# Altium PCB PCB.PcbDoc
Units mm, origin at the board's own origin, x right, y up, seen from the top; angles counter-clockwise.
Board outline 138.3 x 81.41 mm, 2 copper layers (Top Layer, Bottom Layer); 60 components, 9 nets, 156 pads, 0 vias.
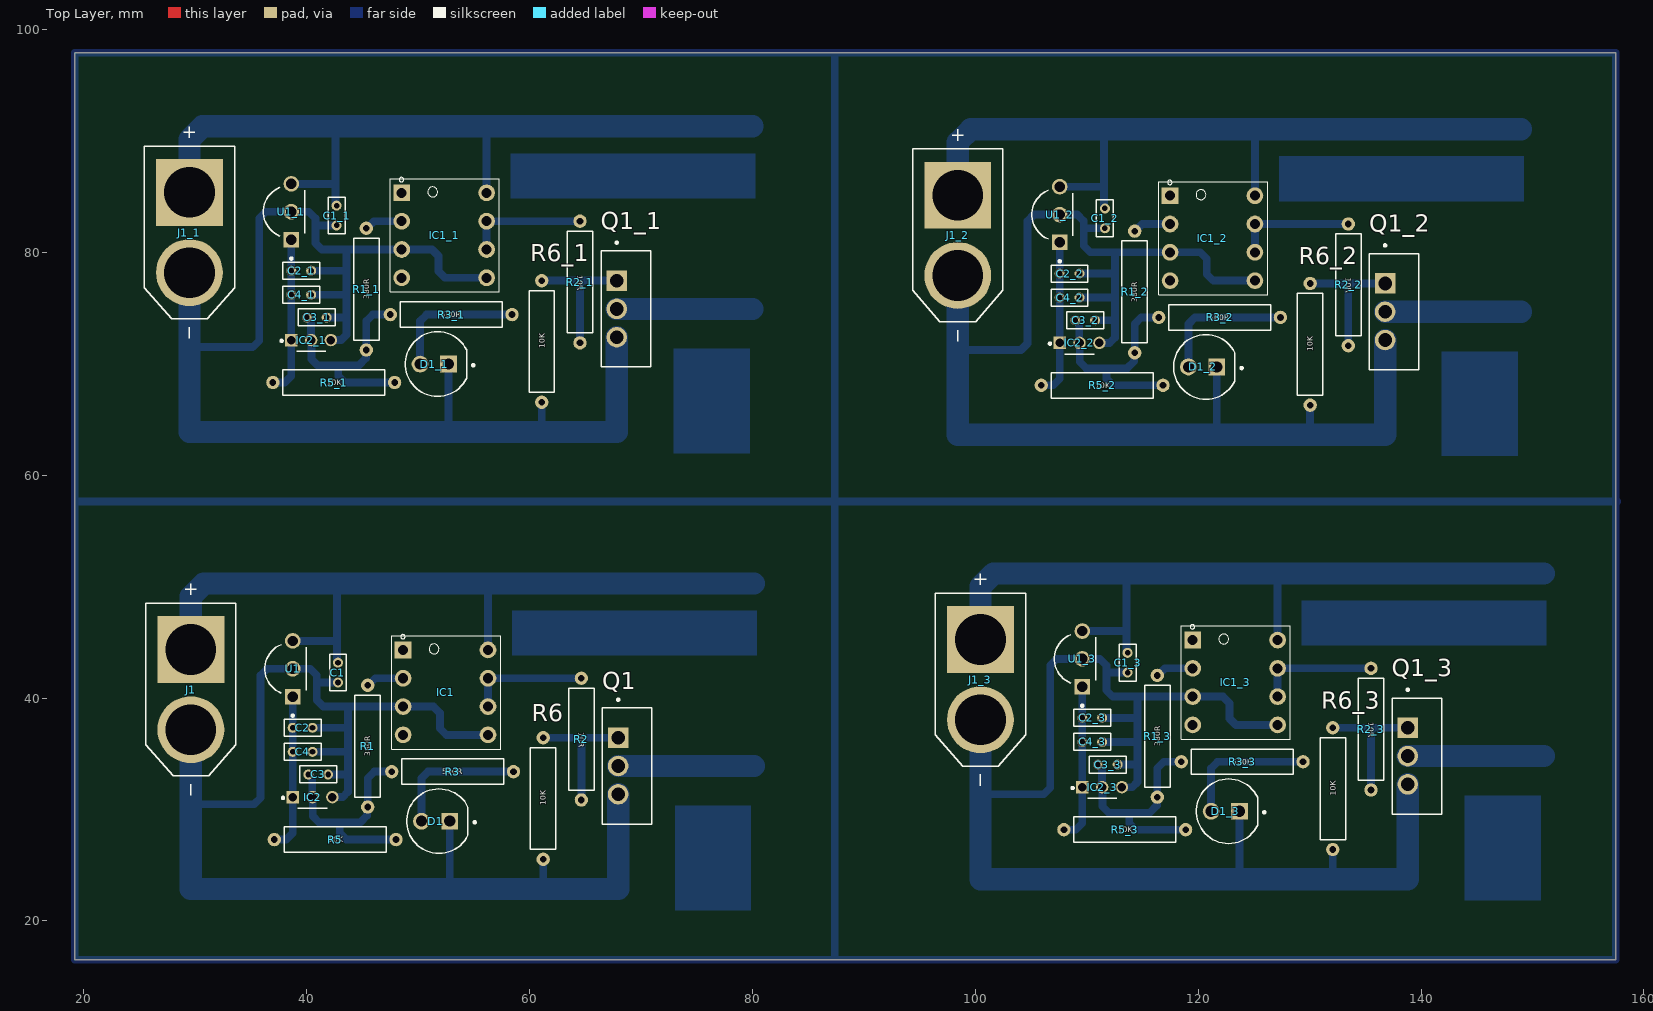
[diagram p0: Top Layer view]
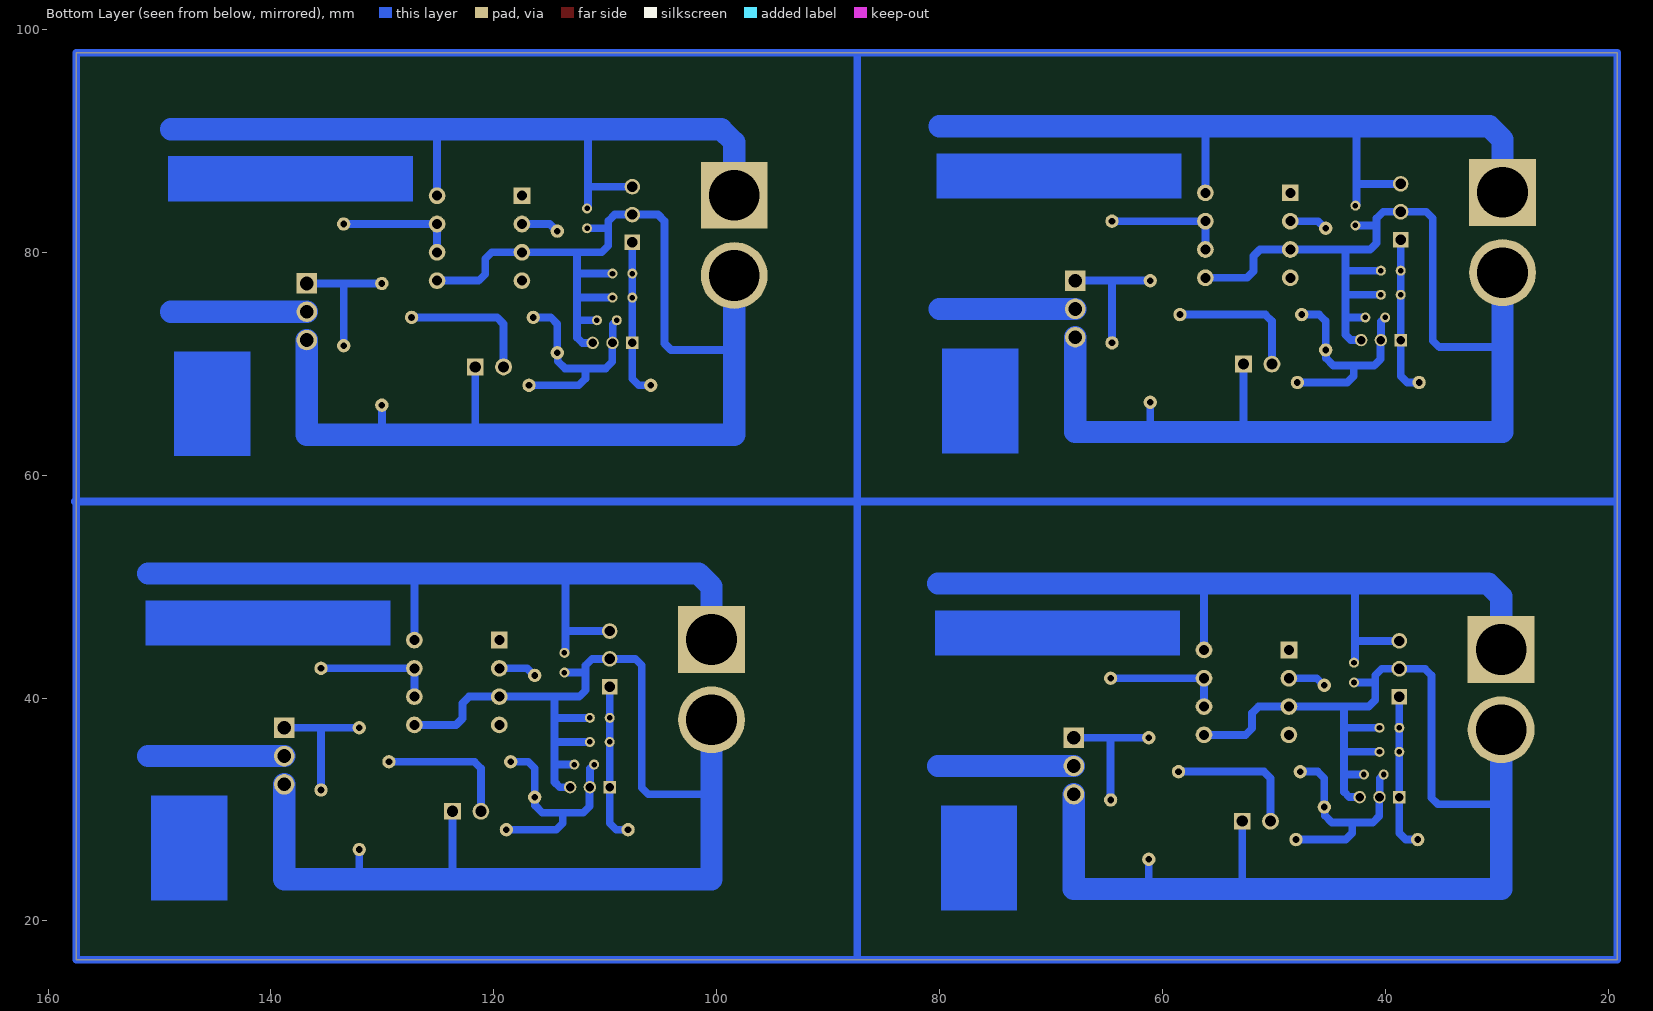
[diagram p1: Bottom Layer view, seen from below]
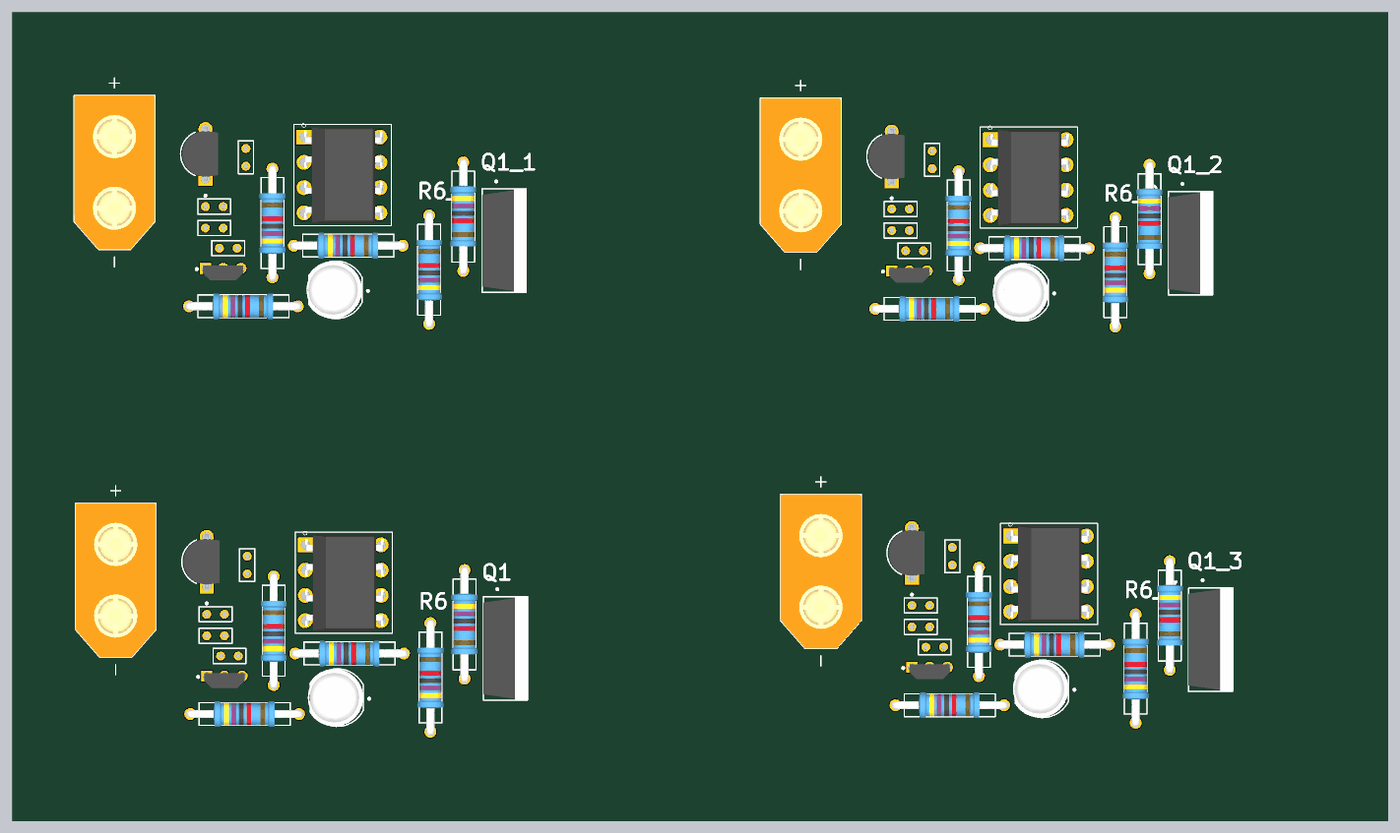
[diagram p2: 3D render of the assembled board from above, using the file's embedded part models]

## Layer stack, top to bottom
Top Solder: solder mask 0.0102, Solder Resist, Dk 3.5
Top Layer: signal copper 0.0356
Dielectric 1: dielectric 0.32, FR-4, Dk 4.8
Bottom Layer: signal copper 0.0356
Bottom Solder: solder mask 0.0102, Solder Resist, Dk 3.5

## Board outline
19.177,16.51 19.177,97.917 157.48,97.917 157.48,16.51

## Design rules (kind name [scope] priority, off if disabled: settings)
Clearance [All] p1: gap=0.254 ignorepadtopadclearanceinfootprint=FALSE
PolygonConnect [All] p1: connectstyle=Relief reliefconductorwidth=0.254 reliefentries=4 polygonreliefangle="90 Angle" airgapwidth=0.254
RoutingVias [All] p1: holewidth=0.711 width=1.27 viastyle="Through Hole" minholewidth=0.711 minwidth=1.27 maxholewidth=0.711 maxwidth=1.27
SolderMaskExpansion [All] p1: expansion=0.102 istentingtop=FALSE
SupplyNets "Schematic Supply Nets" [InNet('GND')] p1: voltage=0.000
Width [All] p1: maxlimit=5 minlimit=0.254 preferedwidth=1 minimp=50.000000 maximp=50.000000 favimp=50.000000
30 further rules are at their usual default settings.

## Classes and differential pairs
component class Sch: C1 C2 C3 C4 D1 IC1 IC2 J1 Q1 R1 R2 R3 R5 R6 U1

## Components (designator, comment, footprint, x,y, rotation, side; value= is the part's Value field where it differs from the comment)
C1 "0.33uF" CER-DIP-CAP 42.799,42.291 r90 top
C1_1 "0.33uF" CER-DIP-CAP 42.672,83.312 r90 top (schematic designator C1)
C1_2 "0.33uF" CER-DIP-CAP 111.633,83.058 r90 top (schematic designator C1)
C1_3 "0.33uF" CER-DIP-CAP 113.665,43.18 r90 top (schematic designator C1)
C2 "0.01uF" CER-DIP-CAP 39.624,37.338 r180 top
C2_1 "0.01uF" CER-DIP-CAP 39.497,78.359 r180 top (schematic designator C2)
C2_2 "0.01uF" CER-DIP-CAP 108.458,78.105 r180 top (schematic designator C2)
C2_3 "0.01uF" CER-DIP-CAP 110.49,38.227 r180 top (schematic designator C2)
C3 "4.7nF" CER-DIP-CAP 41.021,33.147 r180 top
C3_1 "4.7nF" CER-DIP-CAP 40.894,74.168 r180 top (schematic designator C3)
C3_2 "4.7nF" CER-DIP-CAP 109.855,73.914 r180 top (schematic designator C3)
C3_3 "4.7nF" CER-DIP-CAP 111.887,34.036 r180 top (schematic designator C3)
C4 "100nF" CER-DIP-CAP 39.624,35.179 r180 top
C4_1 "100nF" CER-DIP-CAP 39.497,76.2 r180 top (schematic designator C4)
C4_2 "100nF" CER-DIP-CAP 108.458,75.946 r180 top (schematic designator C4)
C4_3 "100nF" CER-DIP-CAP 110.49,36.068 r180 top (schematic designator C4)
D1 "LED" "LED DIP" 51.562,28.956 r180 top
D1_1 "LED" "LED DIP" 51.435,69.977 r180 top (schematic designator D1)
D1_2 "LED" "LED DIP" 120.396,69.723 r180 top (schematic designator D1)
D1_3 "LED" "LED DIP" 122.428,29.845 r180 top (schematic designator D1)
IC1 "TLP250" DIP-8 53.086,40.513 r0 top
IC1_1 "TLP250" DIP-8 52.959,81.534 r0 top (schematic designator IC1)
IC1_2 "TLP250" DIP-8 121.92,81.28 r0 top (schematic designator IC1)
IC1_3 "TLP250" DIP-8 123.952,41.402 r0 top (schematic designator IC1)
IC2 "US1881" UA 40.513,30.861 r0 top
IC2_1 "US1881" UA 40.386,71.882 r0 top (schematic designator IC2)
IC2_2 "US1881" UA 109.347,71.628 r0 top (schematic designator IC2)
IC2_3 "US1881" UA 111.379,31.75 r0 top (schematic designator IC2)
J1 "XT60 Male" "XT60 Male Pin" 29.591,40.767 r270 top
J1_1 "XT60 Male" "XT60 Male Pin" 29.464,81.788 r270 top (schematic designator J1)
J1_2 "XT60 Male" "XT60 Male Pin" 98.425,81.534 r270 top (schematic designator J1)
J1_3 "XT60 Male" "XT60 Male Pin" 100.457,41.656 r270 top (schematic designator J1)
Q1 "TO-220 IRF1405" TO-220 68.755,33.909 r270 top
Q1_1 "TO-220 IRF1405" TO-220 68.628,74.93 r270 top (schematic designator Q1)
Q1_2 "TO-220 IRF1405" TO-220 137.589,74.676 r270 top (schematic designator Q1)
Q1_3 "TO-220 IRF1405" TO-220 139.621,34.798 r270 top (schematic designator Q1)
R1 "380R" "RES DIP" 45.466,35.687 r90 top
R1_1 "380R" "RES DIP" 45.339,76.708 r90 top (schematic designator R1)
R1_2 "380R" "RES DIP" 114.3,76.454 r90 top (schematic designator R1)
R1_3 "380R" "RES DIP" 116.332,36.576 r90 top (schematic designator R1)
R2 "10R" "RES DIP" 64.643,36.322 r270 top
R2_1 "10R" "RES DIP" 64.516,77.343 r270 top (schematic designator R2)
R2_2 "10R" "RES DIP" 133.477,77.089 r270 top (schematic designator R2)
R2_3 "10R" "RES DIP" 135.509,37.211 r270 top (schematic designator R2)
R3 "500R" "RES DIP" 53.086,33.401 r0 top
R3_1 "500R" "RES DIP" 52.959,74.422 r0 top (schematic designator R3)
R3_2 "500R" "RES DIP" 121.92,74.168 r0 top (schematic designator R3)
R3_3 "500R" "RES DIP" 123.952,34.29 r0 top (schematic designator R3)
R5 "10K" "RES DIP" 42.545,27.305 r0 top
R5_1 "10K" "RES DIP" 42.418,68.326 r0 top (schematic designator R5)
R5_2 "10K" "RES DIP" 111.379,68.072 r0 top (schematic designator R5)
R5_3 "10K" "RES DIP" 113.411,28.194 r0 top (schematic designator R5)
R6 "10K" "RES DIP" 61.214,30.988 r90 top
R6_1 "10K" "RES DIP" 61.087,72.009 r90 top (schematic designator R6)
R6_2 "10K" "RES DIP" 130.048,71.755 r90 top (schematic designator R6)
R6_3 "10K" "RES DIP" 132.08,31.877 r90 top (schematic designator R6)
U1 "TO-92 LM78L05" "TO-226 TO-92" 38.735,42.632 r90 top
U1_1 "TO-92 LM78L05" "TO-226 TO-92" 38.608,83.653 r90 top (schematic designator U1)
U1_2 "TO-92 LM78L05" "TO-226 TO-92" 107.569,83.399 r90 top (schematic designator U1)
U1_3 "TO-92 LM78L05" "TO-226 TO-92" 109.601,43.521 r90 top (schematic designator U1)

## Footprints (in the part's own frame and the unit in brackets; to place one, negate y for a bottom-side part, rotate by r counter-clockwise, add the part's x,y. Pads: shape width x height; smd on the part's side, far side on the other; paste and mask are expansions set on the pad)
CER-DIP-CAP [mm]
  round 0.9 hole 0.5: 1(-0.889,0) 2(0.889,0)
  silkscreen extent -1.65,-0.76 1.65,0.76, body extent -1.51,-0.58 1.49,0.57, height 4
DIP-8 [mm]
  rect 1.5x1.5 / inner round 1.5 / far side rect 1.5x1.5 hole 0.9: 1(-4.445,3.81)
  round 1.5 hole 0.9: 2(-4.445,1.27) 3(-4.445,-1.27) 4(-4.445,-3.81) 5(3.175,-3.81) 6(3.175,-1.27) 7(3.175,1.27) 8(3.175,3.81)
  silkscreen extent -5.46,-5.08 4.32,5.2, body extent -4.44,-4.83 3.43,4.83, height 4.85
"LED DIP" [mm]
  round 1.508 hole 1: A(1.27,0)
  rect 1.508x1.508 / inner round 1.508 / far side rect 1.508x1.508 hole 1: C(-1.27,0)
  silkscreen extent -3.6,-2.9 2.6,2.9, body extent -2.9,-2.9 2.51,2.9, height 9.6
"RES DIP" [mm]
  round 1.2 hole 0.6: 1(-5.461,0) 2(5.461,0)
  silkscreen extent -4.57,-1.14 4.57,1.14, body extent -5.93,-1.3 5.93,1.3, height 2.8
TO-220 [mm]
  rect 1.845x1.845 / inner round 1.845 / far side rect 1.845x1.845 hole 1.23: 1(-2.54,-0.81)
  round 1.845 hole 1.23: 2(0,-0.81) 3(2.54,-0.81)
  silkscreen extent -6.06,-2.22 5.21,2.22, body extent -5.21,-2.22 5.21,2.22, height 19.3
"TO-226 TO-92" [mm]
  rect 1.4x1.4 / inner round 1.4 / far side rect 1.4x1.4 hole 0.93: 1(-2.5,0)
  round 1.4 hole 0.93: 2(0,0) 3(2.5,0)
  silkscreen extent -4.3,-1.19 2.18,2.5, body extent -2.74,-1.27 2.74,2.33, height 8.09
UA [mm]
  rect 1.12x1.12 / inner round 1.12 / far side rect 1.12x1.12 hole 0.77: 1(-1.778,0.254)
  round 1.12 hole 0.77: 2(0,0.254) 3(1.778,0.254)
  silkscreen extent -2.75,-0.75 1.31,0.28, body extent -2.05,-0.93 2.05,0.57, height 4.95
"XT60 Male Pin" [mm]
  round 6 hole 4.55: N(3.6,0)
  rect 6x6 / inner round 6 / far side rect 6x6 hole 4.55: P(-3.6,0)
  silkscreen extent -9.5,-4.05 9.5,4.05, body extent -7.75,-4.05 7.75,4.05, height 16.5

## Part data
C1 C1_1 C1_2 C1_3 C2 C2_1 C2_2 C2_3 C3 C3_1 C3_2 C3_3 C4 C4_1 C4_2 C4_3: library part "CAP DIP"
D1 D1_1 D1_2 D1_3: library part "LED DIP"
IC1 IC1_1 IC1_2 IC1_3: library part TLP250-DIP
J1 J1_1 J1_2 J1_3: library part "XT60 Male Pin"
Q1 Q1_1 Q1_2 Q1_3: library part "TO-220 MOSFET"
R1 R1_1 R1_2 R1_3 R2 R2_1 R2_2 R2_3 R3 R3_1 R3_2 R3_3 R5 R5_1 R5_2 R5_3 R6 R6_1 R6_2 R6_3: library part "RES DIP"
U1 U1_1 U1_2 U1_3: library part TO-92

## Nets (pads, with @x,y where several pads share a name; then routed paths per layer and width w, separated by ;. In a path a pad name is that pad's centre, name@x,y a point inside that pad or via, vN(x,y) a via of type N, cw(c..) or ccw(c..) an arc to the next point about the centre after c; other vN are vias at no path point)
3S-6S: C1.2 IC1.8 J1.P U1.3 | length 76.3
  Bottom Layer w0.7: U1.3 42.656,45.132 42.703,45.085 ; 42.703,49.942 42.703,45.085 ; C1.2 42.703,43.276 42.703,45.085 ; IC1.8 56.261,50.292
  Bottom Layer w0.8: 42.703,49.942 42.703,50.292 ; 56.261,50.292 56.261,50.546
  Bottom Layer w1: 42.577,49.816 42.703,49.942 43.053,50.292
  Bottom Layer w2: J1.P@31.379,46.155 J1.P 29.591,49.12 30.763,50.292 42.703,50.292 43.053,50.292 56.261,50.292 80.137,50.292
5V: C2.2 C4.2 IC2.1 R5.1 U1.1 | length 14.1
  Bottom Layer w0.7: R5.1 38.149,27.305 38.735,27.891 IC2.1 C4.2 C2.2 U1.1
GND: C1.1 C2.1 C3.1 C4.1 D1.C IC1.3 IC1.5 IC2.3 J1.N Q1.3 R6.1 U1.2 | length 131.7
  Bottom Layer w0.7: 29.591,30.48 35.266,30.48 35.852,31.066 35.852,42.046 36.438,42.632 U1.2 40.308,42.632 40.894,42.046 40.894,41.402 ; C4.1 43.688,35.179 ; C2.1 43.688,37.338 ; C3.1 43.688,33.147 ; IC2.3@42.268,31.138 IC2.3 43.219,31.115 43.688,31.584 43.688,33.147 ; C1.1 40.894,41.402 ; 52.832,22.987 D1.C ; IC1.5 52.529,36.703 51.943,37.289 51.943,38.657 51.357,39.243 IC1.3 43.561,39.243 ; 61.214,22.987 R6.1 ; 40.894,41.402 40.894,39.829 41.48,39.243 43.561,39.243 ; 43.561,39.243 43.688,39.116 43.688,37.338 ; 43.688,33.147 43.688,35.179 ; 43.688,35.179 43.688,37.338
  Bottom Layer w1: 61.087,22.86 61.214,22.987
  Bottom Layer w2: J1.N 29.591,30.48 29.591,22.86 61.087,22.86 67.945,22.86 ; 67.945,23.114 Q1.3
HallOut: C3.2 IC2.2 R1.1 R3.1 R5.2 | length 21.2
  Bottom Layer w0.7: C3.2 40.49,32.789 40.49,31.138 IC2.2 40.536,31.092 40.536,29.415 41.122,28.829 42.951,28.829 ; R1.1@45.428,30.134 45.428,29.477 44.78,28.829 42.951,28.829 ; R1.1 45.466,32.815 46.052,33.401 R3.1 ; R5.2 43.537,27.305 42.951,27.891 42.951,28.829
Negative: Q1.2 | length 12.2
  Bottom Layer w2: Q1.2 80.137,33.909
NetD1_A: D1.A R3.2 | length 12.4
  Bottom Layer w0.7: D1.A 50.292,32.815 50.878,33.401 R3.2
NetQ1_1: Q1.1 R2.2 R6.2 | length 12.3
  Bottom Layer w0.7: R6.2 64.579,36.449 ; R2.2 64.643,36.386 64.579,36.449 ; Q1.1 64.579,36.449
NetR1_2: IC1.2 R1.2 | length 3.4
  Bottom Layer w0.7: R1.2 45.52,41.148 46.155,41.783 IC1.2
NetR2_1: IC1.6 IC1.7 R2.1 | length 10.9
  Bottom Layer w0.7: IC1.6 IC1.7 R2.1
pads on no net: C1_1.1 C1_1.2 C1_2.1 C1_2.2 C1_3.1 C1_3.2 C2_1.1 C2_1.2 C2_2.1 C2_2.2 C2_3.1 C2_3.2 C3_1.1 C3_1.2 C3_2.1 C3_2.2 C3_3.1 C3_3.2 C4_1.1 C4_1.2 C4_2.1 C4_2.2 C4_3.1 C4_3.2 D1_1.A D1_1.C D1_2.A D1_2.C D1_3.A D1_3.C IC1.1 IC1.4 IC1_1.1 IC1_1.2 IC1_1.3 IC1_1.4 IC1_1.5 IC1_1.6 IC1_1.7 IC1_1.8 IC1_2.1 IC1_2.2 IC1_2.3 IC1_2.4 IC1_2.5 IC1_2.6 IC1_2.7 IC1_2.8 IC1_3.1 IC1_3.2 IC1_3.3 IC1_3.4 IC1_3.5 IC1_3.6 IC1_3.7 IC1_3.8 IC2_1.1 IC2_1.2 IC2_1.3 IC2_2.1 IC2_2.2 IC2_2.3 IC2_3.1 IC2_3.2 IC2_3.3 J1_1.N J1_1.P J1_2.N J1_2.P J1_3.N J1_3.P Q1_1.1 Q1_1.2 Q1_1.3 Q1_2.1 Q1_2.2 Q1_2.3 Q1_3.1 Q1_3.2 Q1_3.3 R1_1.1 R1_1.2 R1_2.1 R1_2.2 R1_3.1 R1_3.2 R2_1.1 R2_1.2 R2_2.1 R2_2.2 R2_3.1 R2_3.2 R3_1.1 R3_1.2 R3_2.1 R3_2.2 R3_3.1 R3_3.2 R5_1.1 R5_1.2 R5_2.1 R5_2.2 R5_3.1 R5_3.2 R6_1.1 R6_1.2 R6_2.1 R6_2.2 R6_3.1 R6_3.2 U1_1.1 U1_1.2 U1_1.3 U1_2.1 U1_2.2 U1_2.3 U1_3.1 U1_3.2 U1_3.3
copper on no net: | length 1542.8
  Bottom Layer w0.7: 19.304,57.658 87.503,57.658 157.607,57.658 ; 29.464,71.501 35.139,71.501 35.725,72.087 35.725,83.067 36.311,83.653 38.608,83.653 40.181,83.653 40.767,83.067 40.767,82.423 ; 36.957,68.326 38.022,68.326 38.608,68.912 38.608,72.136 38.608,76.2 38.608,78.359 38.608,81.153 ; 38.608,86.153 42.529,86.153 42.576,86.106 ; 40.005,74.168 40.363,73.81 40.363,72.159 40.386,72.136 40.409,72.113 40.409,70.436 40.995,69.85 42.824,69.85 ; 40.386,76.2 43.561,76.2 ; 40.386,78.359 43.561,78.359 ; 41.783,74.168 43.561,74.168 ; 42.141,72.159 42.164,72.136 43.092,72.136 43.561,72.605 43.561,74.168 ; 42.576,90.963 42.576,86.106 ; 42.672,82.423 40.767,82.423 ; 42.672,84.201 42.576,84.297 42.576,86.106 ; 45.301,71.155 45.301,70.498 44.653,69.85 42.824,69.85 ; 45.339,71.247 45.339,73.836 45.925,74.422 47.498,74.422 ; 45.339,82.169 45.393,82.169 46.028,82.804 48.514,82.804 ; 47.879,68.326 43.41,68.326 42.824,68.912 42.824,69.85 ; 50.165,69.977 50.165,73.836 50.751,74.422 58.42,74.422 ; 52.705,64.008 52.705,69.977 ; 56.134,77.724 52.402,77.724 51.816,78.31 51.816,79.678 51.23,80.264 48.514,80.264 43.434,80.264 ; 56.134,80.264 56.134,82.804 64.516,82.804 ; 56.134,85.344 56.134,91.313 ; 61.087,64.008 61.087,66.548 ; 61.087,77.47 64.453,77.47 ; 64.516,71.882 64.516,77.406 64.453,77.47 ; 67.818,77.47 64.453,77.47 ; 87.376,16.637 87.376,97.917 ; 98.425,71.247 104.1,71.247 104.686,71.833 104.686,82.813 105.272,83.399 107.569,83.399 109.142,83.399 109.728,82.813 109.728,82.169 ; 100.457,31.369 106.132,31.369 106.718,31.955 106.718,42.935 107.304,43.521 109.601,43.521 111.174,43.521 111.76,42.935 111.76,42.291 ; 105.918,68.072 106.983,68.072 107.569,68.658 107.569,71.882 107.569,75.946 107.569,78.105 107.569,80.899 ; 107.569,85.899 111.49,85.899 111.537,85.852 ; 107.95,28.194 109.015,28.194 109.601,28.78 109.601,32.004 109.601,36.068 109.601,38.227 109.601,41.021 ; 108.966,73.914 109.324,73.556 109.324,71.905 109.347,71.882 109.37,71.859 109.37,70.182 109.956,69.596 111.785,69.596 ; 109.347,75.946 112.522,75.946 ; 109.347,78.105 112.522,78.105 ; 109.601,46.021 113.522,46.021 113.569,45.974 ; 110.744,73.914 112.522,73.914 ; 110.998,34.036 111.356,33.678 111.356,32.027 111.379,32.004 111.402,31.981 111.402,30.304 111.988,29.718 113.817,29.718 ; 111.102,71.905 111.125,71.882 112.053,71.882 112.522,72.351 112.522,73.914 ; 111.379,36.068 114.554,36.068 ; 111.379,38.227 114.554,38.227 ; 111.537,90.709 111.537,85.852 ; 111.633,82.169 109.728,82.169 ; 111.633,83.947 111.537,84.043 111.537,85.852 ; 112.776,34.036 114.554,34.036 ; 113.134,32.027 113.157,32.004 114.085,32.004 114.554,32.473 114.554,34.036 ; 113.569,50.831 113.569,45.974 ; 113.665,42.291 111.76,42.291 ; 113.665,44.069 113.569,44.165 113.569,45.974 ; 114.262,70.901 114.262,70.244 113.614,69.596 111.785,69.596 ; 114.3,70.993 114.3,73.582 114.886,74.168 116.459,74.168 ; 114.3,81.915 114.354,81.915 114.989,82.55 117.475,82.55 ; 116.294,31.023 116.294,30.366 115.646,29.718 113.817,29.718 ; 116.332,31.115 116.332,33.704 116.918,34.29 118.491,34.29 ; 116.332,42.037 116.386,42.037 117.021,42.672 119.507,42.672 ; 116.84,68.072 112.371,68.072 111.785,68.658 111.785,69.596 ; 118.872,28.194 114.403,28.194 113.817,28.78 113.817,29.718 ; 119.126,69.723 119.126,73.582 119.712,74.168 127.381,74.168 ; 121.158,29.845 121.158,33.704 121.744,34.29 129.413,34.29 ; 121.666,63.754 121.666,69.723 ; 123.698,23.876 123.698,29.845 ; 125.095,77.47 121.363,77.47 120.777,78.056 120.777,79.424 120.191,80.01 117.475,80.01 112.395,80.01 ; 125.095,80.01 125.095,82.55 133.477,82.55 ; 125.095,85.09 125.095,91.059 ; 127.127,37.592 123.395,37.592 122.809,38.178 122.809,39.546 122.223,40.132 119.507,40.132 114.427,40.132 ; 127.127,40.132 127.127,42.672 135.509,42.672 ; 127.127,45.212 127.127,51.181 ; 130.048,63.754 130.048,66.294 ; 130.048,77.216 133.413,77.216 ; 132.08,23.876 132.08,26.416 ; 132.08,37.338 135.445,37.338 ; 133.477,71.628 133.477,77.153 133.413,77.216 ; 135.509,31.75 135.509,37.274 135.445,37.338 ; 136.779,77.216 133.413,77.216 ; 138.811,37.338 135.445,37.338 ; 40.767,82.423 40.767,80.85 41.353,80.264 43.434,80.264 ; 43.434,80.264 43.561,80.137 43.561,78.359 ; 43.561,74.168 43.561,76.2 ; 43.561,76.2 43.561,78.359 ; 109.728,82.169 109.728,80.596 110.314,80.01 112.395,80.01 ; 111.76,42.291 111.76,40.718 112.346,40.132 114.427,40.132 ; 112.395,80.01 112.522,79.883 112.522,78.105 ; 112.522,73.914 112.522,75.946 ; 112.522,75.946 112.522,78.105 ; 114.427,40.132 114.554,40.005 114.554,38.227 ; 114.554,34.036 114.554,36.068 ; 114.554,36.068 114.554,38.227 ; 19.177,16.51 19.177,97.917 157.48,97.917 157.48,16.51 19.177,16.51
  Bottom Layer w0.8: 42.576,90.963 42.576,91.313 ; 56.134,91.313 56.134,91.567 ; 111.537,90.709 111.537,91.059 ; 113.569,50.831 113.569,51.181 ; 122.809,90.932 122.809,91.186 ; 127.127,51.181 127.127,51.435
  Bottom Layer w1: 42.45,90.837 42.576,90.963 42.926,91.313 ; 60.96,63.881 61.087,64.008 ; 111.411,90.583 111.537,90.709 111.887,91.059 ; 113.443,50.705 113.569,50.831 113.919,51.181 ; 129.921,63.627 130.048,63.754 ; 131.953,23.749 132.08,23.876
  Bottom Layer w2: 29.464,78.188 29.464,71.501 29.464,63.881 60.96,63.881 67.818,63.881 ; 31.252,87.176 29.464,85.388 29.464,90.141 30.636,91.313 42.576,91.313 42.926,91.313 56.134,91.313 80.01,91.313 ; 67.818,64.135 67.818,72.39 ; 67.818,74.93 80.01,74.93 ; 98.425,77.934 98.425,71.247 98.425,63.627 129.921,63.627 136.779,63.627 ; 100.213,86.922 98.425,85.134 98.425,89.887 99.597,91.059 111.537,91.059 111.887,91.059 125.095,91.059 148.971,91.059 ; 100.457,38.056 100.457,31.369 100.457,23.749 131.953,23.749 138.811,23.749 ; 102.245,47.044 100.457,45.256 100.457,50.009 101.629,51.181 113.569,51.181 113.919,51.181 127.127,51.181 151.003,51.181 ; 136.779,63.881 136.779,72.136 ; 136.779,74.676 148.971,74.676 ; 138.811,24.003 138.811,32.258 ; 138.811,34.798 151.003,34.798

## Other copper
Bottom Layer:
  rectangle: 58.42,43.815 80.391,47.879
  rectangle: 73.025,20.955 79.883,30.353
  rectangle: 129.286,44.704 151.257,48.768
  rectangle: 143.891,21.844 150.749,31.242
  rectangle: 127.254,84.582 149.225,88.646
  rectangle: 141.859,61.722 148.717,71.12
  rectangle: 58.293,84.836 80.264,88.9
  rectangle: 72.898,61.976 79.756,71.374